# Altium PCB SmartValve.PcbDoc
Units mm, origin at the board's own origin, x right, y up, seen from the top; angles counter-clockwise.
Board outline 65 x 70 mm, 2 copper layers (Top Layer, Bottom Layer); 47 components, 51 nets, 192 pads, 43 vias.
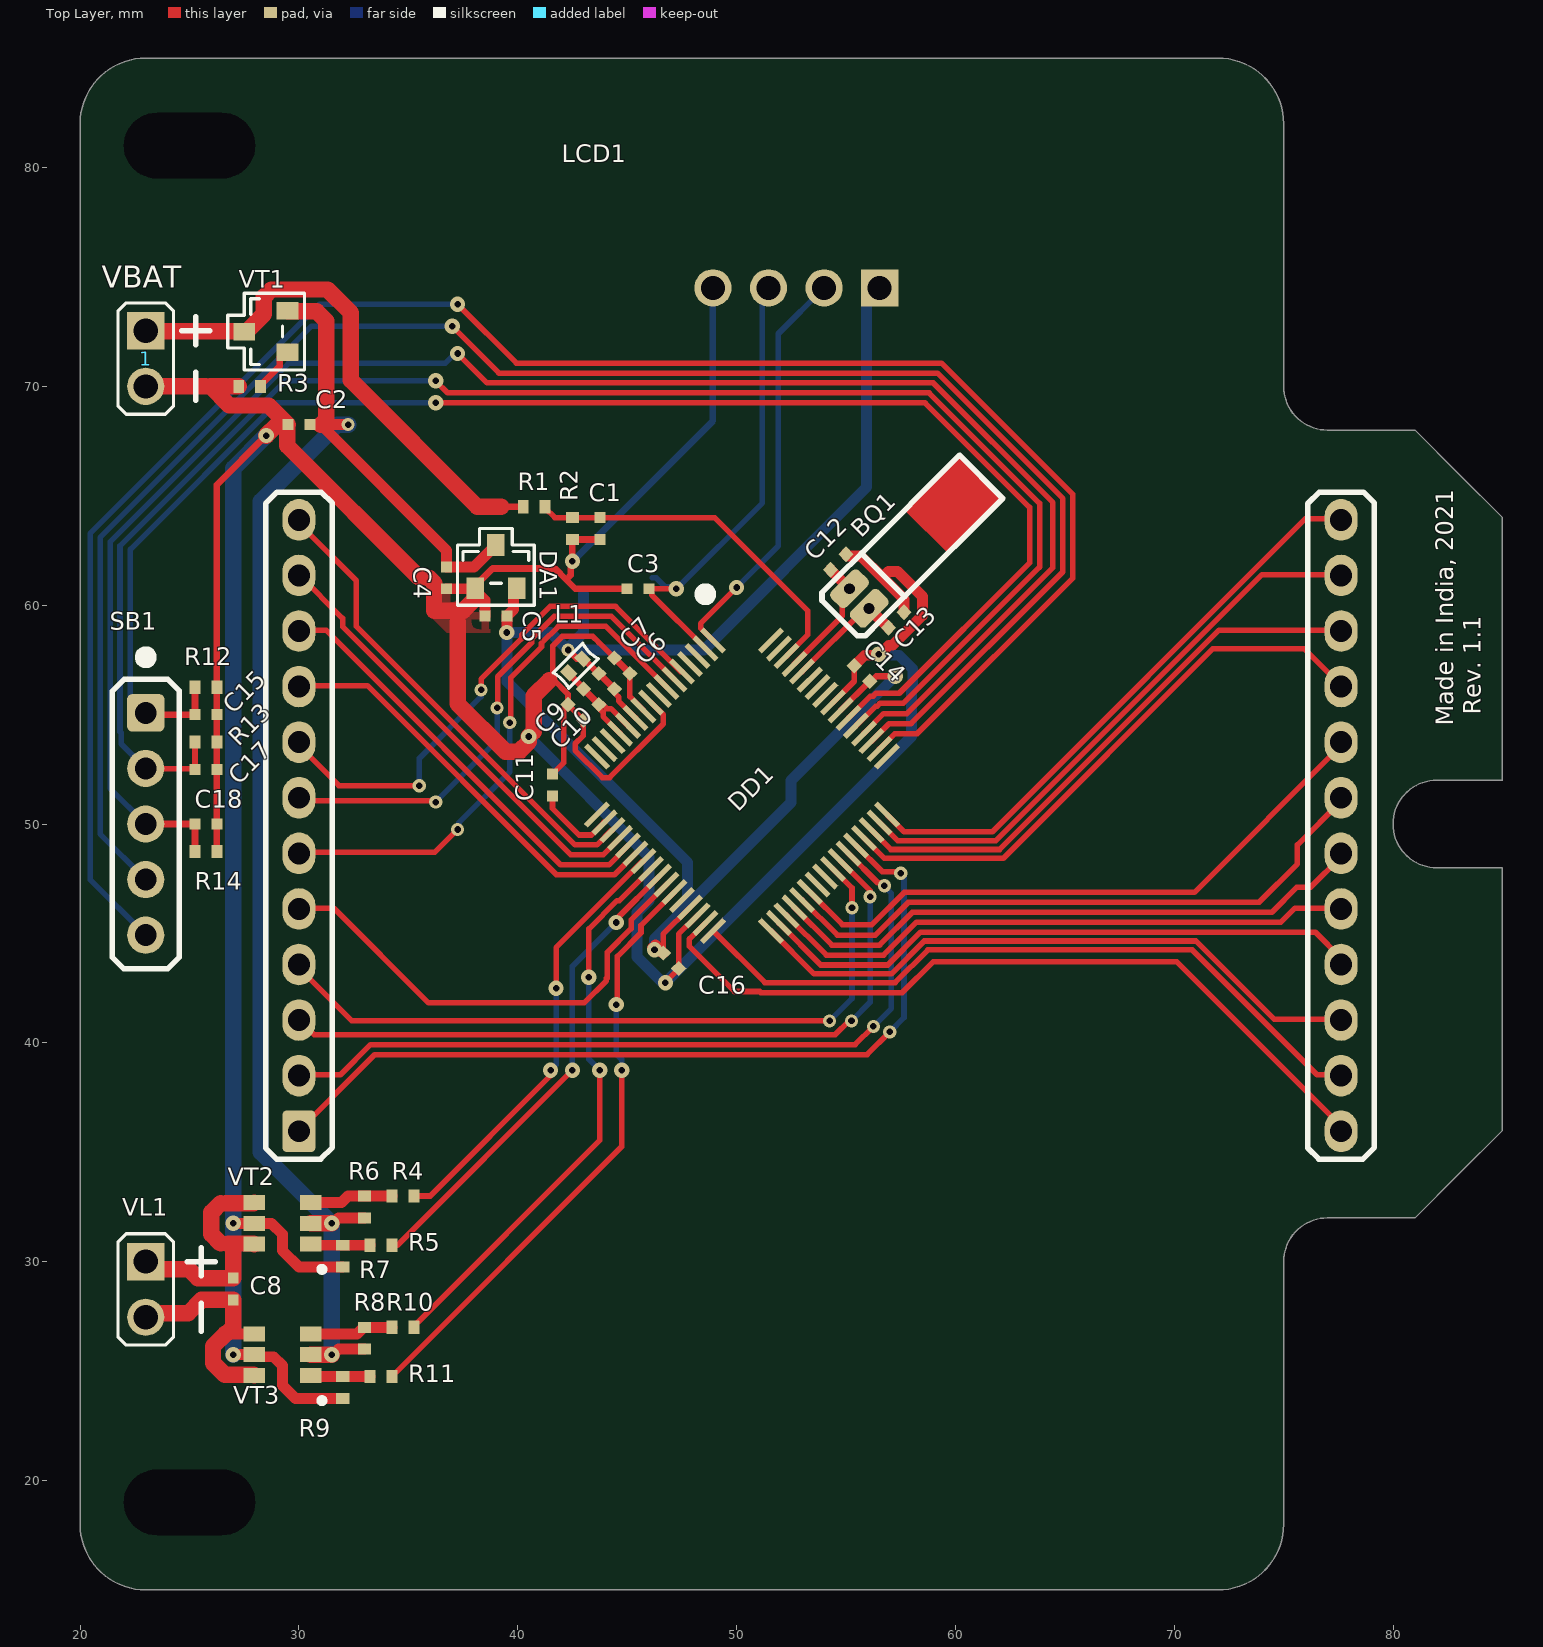
[diagram p0: Top Layer view]
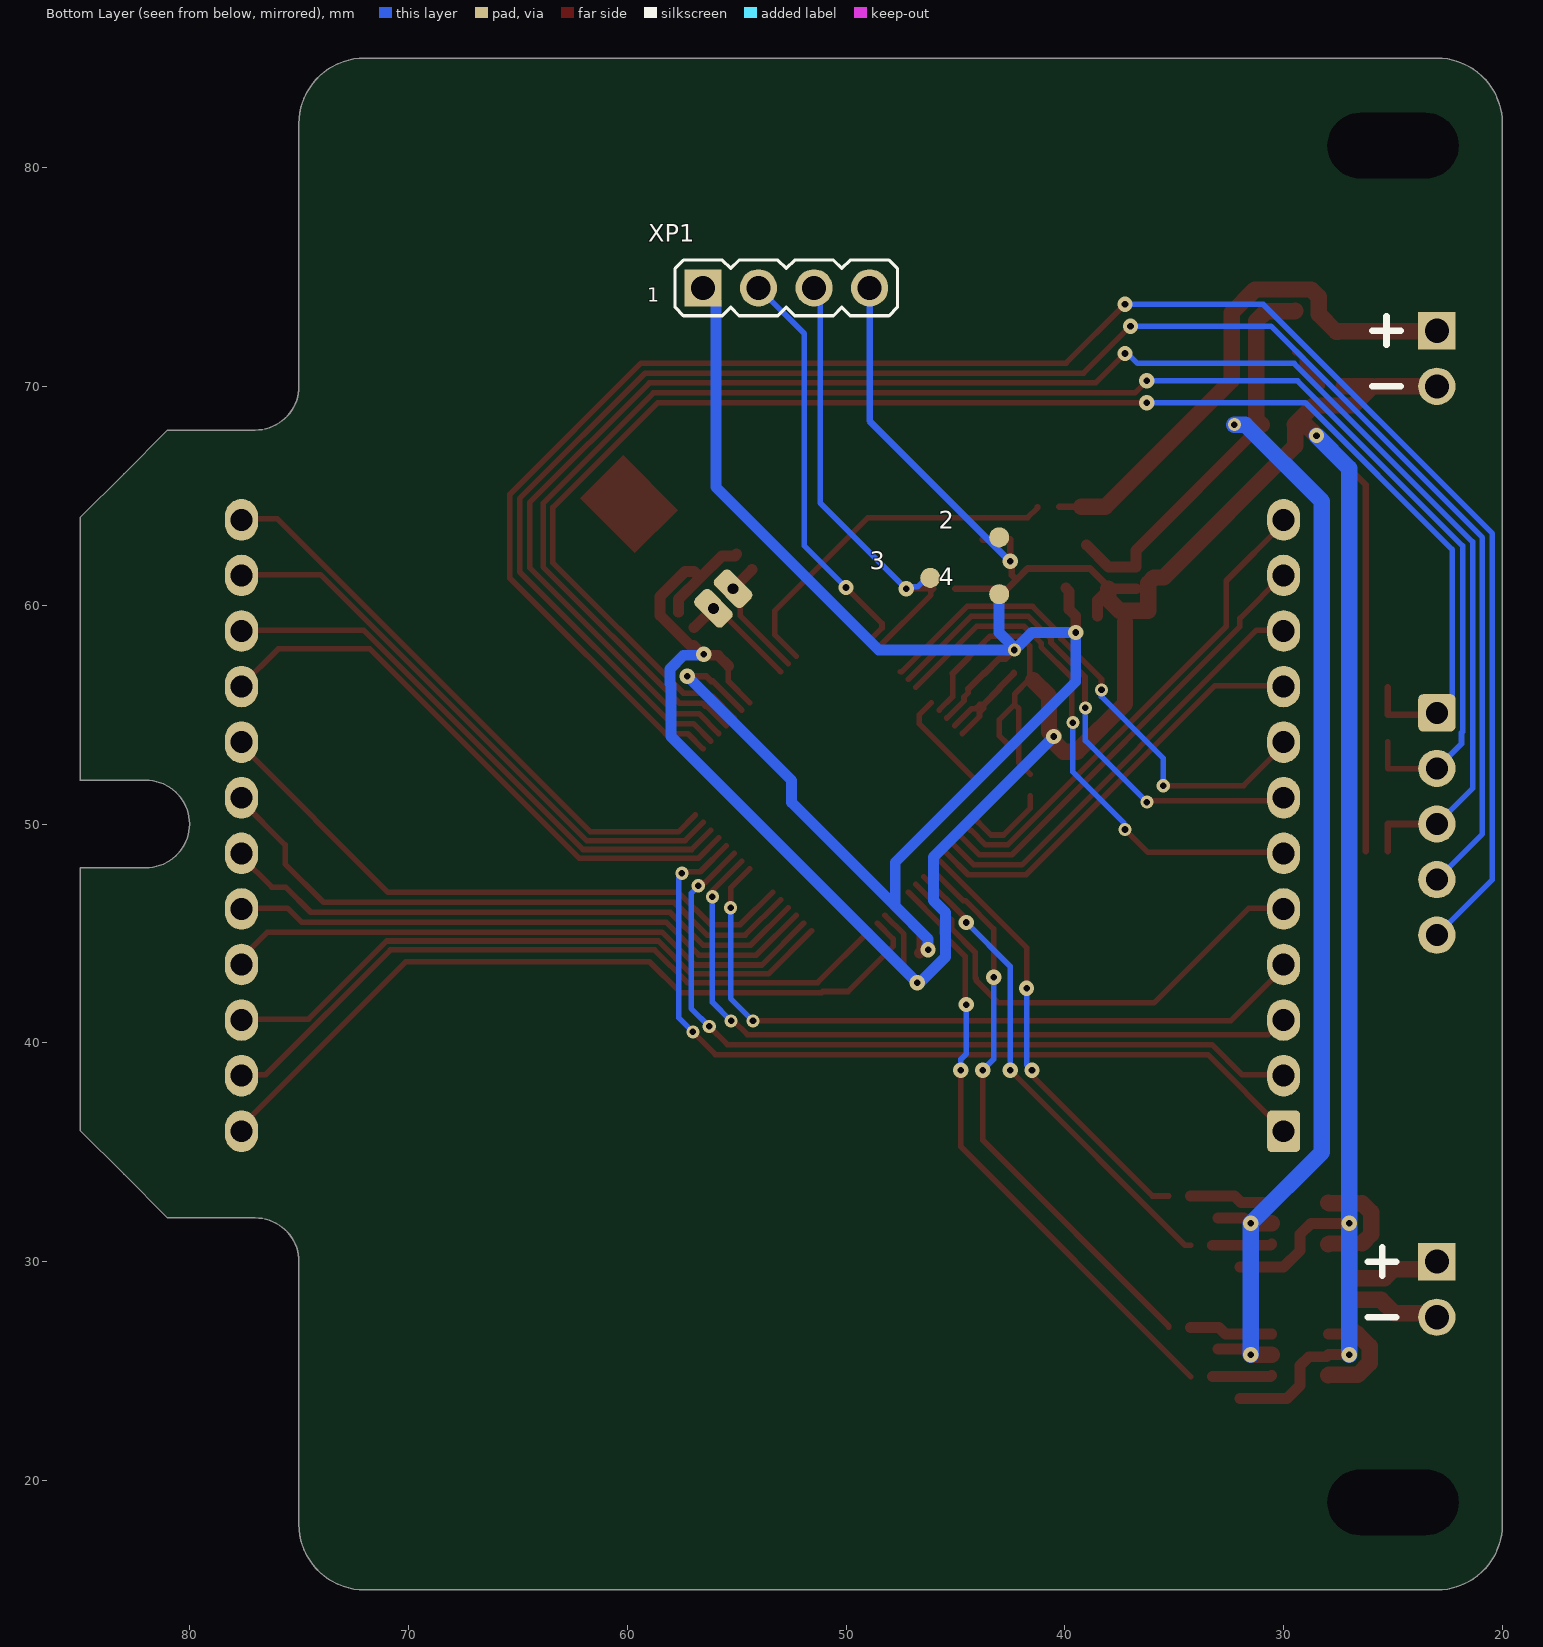
[diagram p1: Bottom Layer view, seen from below]

## Layer stack, top to bottom
Top Solder: solder mask 0.0102, Solder Resist, Dk 3.5
Top Layer: signal copper 0.0356
Dielectric 1: dielectric 0.32, FR-4, Dk 4.8
Bottom Layer: signal copper 0.0356
Bottom Solder: solder mask 0.0102, Solder Resist, Dk 3.5

## Board outline
23,15 72,15 ccw(c72,18) 75,18 75,30 cw(c77,30) 77,32 81,32 83,34 85,36 85,48 82,48 cw(c82,50) 80,50 cw(c82,50) 82,52 85,52 85,64 83,66 81,68 77,68 cw(c77,70) 75,70 75,82 ccw(c72,82) 72,85 23,85 ccw(c23,82) 20,82 20,18 ccw(c23,18)

## Design rules (kind name [scope] priority, off if disabled: settings)
AcuteAngle [All] p1: minimum=3.50000000000000E+0001 checktracksonly=FALSE
BoardOutlineClearance "BoardOutlineClearance 1" [All] p1: gap=0.25 ignorepadtopadclearanceinfootprint=FALSE except(0: Arc-SplitContinuation Track-SplitContinuation SMDPad-SplitContinuation THPad-SplitContinuation Via-SplitContinuation Fill-SplitContinuation Poly-SplitContinuation Region-SplitContinuation Text-SplitContinuation) // Milling
BoardOutlineClearance "BoardOutlineClearance 2" [All] p2: gap=0.4 ignorepadtopadclearanceinfootprint=FALSE except(0: Arc-SplitContinuation Track-SplitContinuation SMDPad-SplitContinuation THPad-SplitContinuation Via-SplitContinuation Fill-SplitContinuation Poly-SplitContinuation Region-SplitContinuation Text-SplitContinuation) // V-Cut
Clearance "Clearance 3 Oz" [All] p1 off: gap=0.35 ignorepadtopadclearanceinfootprint=FALSE except(0.25: Arc-Hole Track-Hole SMDPad-Hole THPad-Hole Via-Hole Fill-Hole Poly-Hole Region-Hole Text-Hole)
Clearance "Clearance 2 Oz" [All] p2 off: gap=0.3 ignorepadtopadclearanceinfootprint=FALSE except(0.25: Arc-Hole Track-Hole SMDPad-Hole THPad-Hole Via-Hole Fill-Hole Poly-Hole Region-Hole Text-Hole)
Clearance "Clearance-1 1 Oz" [All] p3: gap=0.2 ignorepadtopadclearanceinfootprint=FALSE except(0.25: Arc-Hole Track-Hole SMDPad-Hole THPad-Hole Via-Hole Fill-Hole Poly-Hole Region-Hole Text-Hole) // Standart
Clearance "Clearance-2 1 Oz" [All] p4 off: gap=0.15 ignorepadtopadclearanceinfootprint=FALSE except(0.2: Arc-Fill Arc-Poly Track-Fill Track-Poly SMDPad-Fill SMDPad-Poly THPad-Fill THPad-Poly Via-Fill Via-Poly Fill-Fill Fill-Poly Poly-Poly; 0.25: Arc-Hole Track-Hole SMDPad-Hole THPad-Hole Via-Hole Fill-Hole Poly-Hole Region-Hole Text-Hole) // Advance
Clearance "Clearance-1 1/2 Oz" [All] p5 off: gap=0.125 ignorepadtopadclearanceinfootprint=FALSE except(0.2: Arc-Fill Arc-Poly Track-Fill Track-Poly SMDPad-SMDPad SMDPad-Fill SMDPad-Poly THPad-Fill THPad-Poly Via-Fill Via-Poly Fill-Fill Fill-Poly Poly-Poly Poly-Region Poly-Text; 0.25: Arc-Hole Track-Hole SMDPad-Hole THPad-Hole Via-Hole Fill-Hole Poly-Hole Region-Hole Text-Hole) // Standart
Clearance "Clearance-2 1/2 Oz" [All] p6 off: gap=0.1 ignorepadtopadclearanceinfootprint=FALSE except(0.15: Arc-Fill Arc-Poly Track-Fill Track-Poly SMDPad-SMDPad SMDPad-Fill SMDPad-Poly THPad-Fill THPad-Poly Via-Fill Via-Poly Fill-Fill Fill-Poly Poly-Poly Poly-Region Poly-Text; 0.25: Arc-Hole Track-Hole SMDPad-Hole THPad-Hole Via-Hole Fill-Hole Poly-Hole Region-Hole Text-Hole) // Advance
DiffPairsRouting "DiffPairsRouting 1 Oz" [All] p1: maxlimit=0.254 minlimit=0.2 mostfreqgap=0.254 toplayer_minwidth=0.2 toplayer_maxwidth=0.381 toplayer_prefwidth=0.381 bottomlayer_minwidth=0.2 bottomlayer_maxwidth=0.381 bottomlayer_prefwidth=0.381 maxuncoupledlength=12.7
DiffPairsRouting "DiffPairsRouting 1/2 Oz" [All] p2: maxlimit=0.254 minlimit=0.1 mostfreqgap=0.254 toplayer_minwidth=0.1 toplayer_maxwidth=0.381 toplayer_prefwidth=0.381 bottomlayer_minwidth=0.1 bottomlayer_maxwidth=0.381 bottomlayer_prefwidth=0.381 maxuncoupledlength=12.7
HoleSize "Minimum HoleSize" [IsPad] p1: absolutevalues=TRUE maxlimit=5.9 minlimit=0.6 maxpercent=80.000 minpercent=20.000
HoleSize "Minimum HoleSize VIA 1" [IsVia] p2: absolutevalues=TRUE maxlimit=5.9 minlimit=0.3 maxpercent=80.000 minpercent=20.000 // Standart
HoleSize "Minimum HoleSize VIA 2" [IsVia] p3: absolutevalues=TRUE maxlimit=5.9 minlimit=0.2 maxpercent=80.000 minpercent=20.000 // Advance
HoleToHoleClearance Hole2HoleClearance [All] p1: gap=0.25 allowstackedmicrovias=FALSE
MinimumAnnularRing "Minimum AR VIA Standart" [All] p1: minimumring=0.15
MinimumAnnularRing "Minimum AR PAD Standart" [All] p2: minimumring=0.2
MinimumAnnularRing "Minimum AR VIA Advance" [All] p3: minimumring=0.1
MinimumAnnularRing "Minimum AR PAD Advance" [All] p4: minimumring=0.15
MinimumSolderMaskSliver "SolderMask Bridge Standart" [All] p1: minsoldermaskwidth=0.15 // All Masks
MinimumSolderMaskSliver "SolderMask Bridge Advance" [All] p2: minsoldermaskwidth=0.1 // Mask LDI
PlaneClearance "PlaneClearance 3 Oz" [All] p1: clearance=0.35
PlaneClearance "PlaneClearance 2 Oz" [All] p2: clearance=0.3
PlaneClearance "PlaneClearance 1 Oz" [All] p3: clearance=0.2
PlaneClearance "PlaneClearance-1 1/2 Oz" [All] p4: clearance=0.2 // Standart
PlaneClearance "PlaneClearance-2 1/2 Oz" [All] p5: clearance=0.15 // Advance
PlaneConnect "TermalConnect 3 Oz" [All] p1: planeconnectstyle=Relief reliefexpansion=0.2 reliefentries=4 reliefconductorwidth=0.35 reliefairgap=0.35 // Standart
PlaneConnect "TermalConnect 2 Oz" [All] p2: planeconnectstyle=Relief reliefexpansion=0.2 reliefentries=4 reliefconductorwidth=0.3 reliefairgap=0.3 // Standart
PlaneConnect "TermalConnect-1 1 Oz" [All] p3: planeconnectstyle=Relief reliefexpansion=0.2 reliefentries=4 reliefconductorwidth=0.2 reliefairgap=0.2 // Standart
PlaneConnect "TermalConnect-2 1 Oz" [All] p4: pad.planeconnectstyle=Relief pad.reliefexpansion=0.15 pad.reliefentries=4 pad.reliefconductorwidth=0.2 pad.reliefairgap=0.2 via.planeconnectstyle=Direct via.reliefexpansion=0.15 via.reliefentries=4 via.reliefconductorwidth=0.15 via.reliefairgap=0.15 // Advance
PlaneConnect "TermalConnect-1 1/2 Oz" [All] p5: planeconnectstyle=Relief reliefexpansion=0.2 reliefentries=4 reliefconductorwidth=0.2 reliefairgap=0.2 // Standart
PlaneConnect "TermalConnect-2 1/2 Oz" [All] p6: pad.planeconnectstyle=Relief pad.reliefexpansion=0.15 pad.reliefentries=4 pad.reliefconductorwidth=0.15 pad.reliefairgap=0.15 via.planeconnectstyle=Direct via.reliefexpansion=0.15 via.reliefentries=4 via.reliefconductorwidth=0.15 via.reliefairgap=0.15 // Advance
PolygonConnect "PolygonConnect 3 Oz" [All] p1: thpad.connectstyle=Relief thpad.reliefconductorwidth=0.35 thpad.reliefentries=4 thpad.polygonreliefangle="90 Angle" thpad.airgapwidth=0.35 smdpad.connectstyle=Relief smdpad.reliefconductorwidth=0.35 smdpad.reliefentries=4 smdpad.polygonreliefangle="90 Angle" smdpad.airgapwidth=0.35 via.connectstyle=Direct via.reliefconductorwidth=0.254 via.reliefentries=4 via.polygonreliefangle="90 Angle" via.airgapwidth=0.254
PolygonConnect "PolygonConnect 2 Oz" [All] p2: thpad.connectstyle=Relief thpad.reliefconductorwidth=0.3 thpad.reliefentries=4 thpad.polygonreliefangle="90 Angle" thpad.airgapwidth=0.3 smdpad.connectstyle=Relief smdpad.reliefconductorwidth=0.3 smdpad.reliefentries=4 smdpad.polygonreliefangle="90 Angle" smdpad.airgapwidth=0.3 via.connectstyle=Direct via.reliefconductorwidth=0.254 via.reliefentries=4 via.polygonreliefangle="90 Angle" via.airgapwidth=0.254
PolygonConnect "PolygonConnect-1 1 Oz" [All] p3: thpad.connectstyle=Relief thpad.reliefconductorwidth=0.2 thpad.reliefentries=4 thpad.polygonreliefangle="90 Angle" thpad.airgapwidth=0.2 smdpad.connectstyle=Relief smdpad.reliefconductorwidth=0.2 smdpad.reliefentries=4 smdpad.polygonreliefangle="90 Angle" smdpad.airgapwidth=0.2 via.connectstyle=Direct via.reliefconductorwidth=0.254 via.reliefentries=4 via.polygonreliefangle="90 Angle" via.airgapwidth=0.254 // Standart
PolygonConnect "PolygonConnect-2 1 Oz" [All] p4: thpad.connectstyle=Relief thpad.reliefconductorwidth=0.15 thpad.reliefentries=4 thpad.polygonreliefangle="90 Angle" thpad.airgapwidth=0.15 smdpad.connectstyle=Relief smdpad.reliefconductorwidth=0.15 smdpad.reliefentries=4 smdpad.polygonreliefangle="90 Angle" smdpad.airgapwidth=0.15 via.connectstyle=Direct via.reliefconductorwidth=0.254 via.reliefentries=4 via.polygonreliefangle="90 Angle" via.airgapwidth=0.254 // Advance
PolygonConnect "PolygonConnect-1 1/2 Oz" [All] p5: thpad.connectstyle=Relief thpad.reliefconductorwidth=0.15 thpad.reliefentries=4 thpad.polygonreliefangle="90 Angle" thpad.airgapwidth=0.2 smdpad.connectstyle=Relief smdpad.reliefconductorwidth=0.2 smdpad.reliefentries=4 smdpad.polygonreliefangle="90 Angle" smdpad.airgapwidth=0.2 via.connectstyle=Direct via.reliefconductorwidth=0.254 via.reliefentries=4 via.polygonreliefangle="90 Angle" via.airgapwidth=0.254 // Standart
PolygonConnect "PolygonConnect-2 1/2 Oz" [All] p6: thpad.connectstyle=Relief thpad.reliefconductorwidth=0.125 thpad.reliefentries=4 thpad.polygonreliefangle="90 Angle" thpad.airgapwidth=0.15 smdpad.connectstyle=Relief smdpad.reliefconductorwidth=0.125 smdpad.reliefentries=4 smdpad.polygonreliefangle="90 Angle" smdpad.airgapwidth=0.15 via.connectstyle=Direct via.reliefconductorwidth=0.254 via.reliefentries=4 via.polygonreliefangle="90 Angle" via.airgapwidth=0.254 // Advance
RoutingCorners [All] p1 off: cornerstyle=45-Degree minsetback=2.54 maxsetback=2.54
RoutingVias [All] p1: holewidth=0.3 width=0.6 viastyle="Through Hole" minholewidth=0.2 minwidth=0.4 maxholewidth=5.9 maxwidth=6.4
SilkToSilkClearance Silk2SilkClearance [All] p1 off: silktosilkclearance=0.15
SilkToSolderMaskClearance Silk2SolderMaskClearance [IsPad] p1 off: minsilkscreentomaskgap=0.15 clearancetoexposedcopper=TRUE
SolderMaskExpansion SolderMaskExpansion-1 [All] p1: expansion=0.05 // Standart
SolderMaskExpansion "SolderMaskExpansion LDI" [All] p2: expansion=0.025 // Advance
UnRoutedNet [All] p1: checkbadconnections=TRUE
Width "Width 3 Oz" [All] p1 off: maxlimit=10 minlimit=0.35 preferedwidth=0.4 checkconnectedcopper=TRUE
Width "Width 2 Oz" [All] p2 off: maxlimit=10 minlimit=0.3 preferedwidth=0.35 minimp=50.000000 maximp=50.000000 favimp=50.000000 checkconnectedcopper=TRUE
Width "Width 1 Oz" [All] p3: maxlimit=10 minlimit=0.15 preferedwidth=0.2 checkconnectedcopper=TRUE
Width "Width 1/2 Oz" [All] p4 off: maxlimit=10 minlimit=0.1 preferedwidth=0.125 checkconnectedcopper=TRUE
20 further rules are at their usual default settings.

## Classes and differential pairs
component class SmartValve: 1 2 3 4 BQ1 C1 C2 C3 C4 C5 C6 C7 C8 C9 C10 C11 C12 C13 C14 C15 C16 C17 C18 DA1 DD1 L1 R1 R2 R3 R4 R5 R6 R7 R8 R9 R10 R11 SB1 VL1 VT1 VT2 VT3 XP1

## Components (designator, comment, footprint, x,y, rotation, side; value= is the part's Value field where it differs from the comment)
1 "3xAA" BAT_3AA 23,72.54 r270 top
2 "=Note" TP_36_PAD 43,63.1 r90 bottom
3 "=Note" TP_36_PAD 46.15,61.246 r90 bottom
4 "=Note" TP_36_PAD 43,60.5 r90 bottom
BQ1 "AB26T" "6.2 x 02.1MM CYLINDER PACKAGE" 55.16,60.751 r315 top
C1 "0.01uF" CC0402_0.5mm 43.75,63.5 r270 top
C2 "1uF" CC0402_0.5mm 30,68.25 r180 top
C3 "0.1uF" CC0402_0.5mm 45.5,60.75 r180 top
C4 "1uF" CC0402_0.5mm 36.75,61.25 r270 top
C5 "1uF" CC0402_0.5mm 39,59.5 r180 top
C6 "0.1uF" CC0402_0.5mm 44.77,56.523 r45 top
C7 "1uF" CC0402_0.5mm 44.063,57.23 r45 top
C8 "1uF" CC0402_0.5mm 27,28.75 r270 top
C9 "1uF" CC0402_0.5mm 42.649,55.816 r225 top
C10 "0.1uF" CC0402_0.5mm 43.356,55.109 r225 top
C11 "1uF" CC0402_0.5mm 41.588,51.78 r90 top
C12 "10.0" CC0402_0.5mm 54.644,61.975 r225 top
C13 "10.0" CC0402_0.5mm 57.296,59.323 r225 top
C14 "1uF" CC0402_0.5mm 55.73,56.877 r315 top
C15 "0.1uF" CC0402_0.5mm 25.75,55 r180 top
C16 "1uF" CC0402_0.5mm 47,43.75 r135 top
C17 "0.1uF" CC0402_0.5mm 25.75,52.5 r180 top
C18 "0.1uF" CC0402_0.5mm 25.75,50 r180 top
DA1 "AP2138" SOT-23 39,61.75 r90 top
DD1 "STM8L052R8" TQFP-64 50.25,51.75 r315 top
L1 "BLM15AG-600 Ом" CL0402(1005) 42.649,57.23 r225 top value="600 Ом"
LCD1 "8x16" LCD_8x16 30,35.96 r0 top
R1 "2M" RC0402 40.75,64.5 r0 top
R2 "2M" RC0402 42.5,63.5 r270 top
R3 "10k" RC0402 27.75,70 r180 top
R4 "150.0" RC0402 34.75,33 r180 top
R5 "150.0" RC0402 33.75,30.75 r180 top
R6 "10k" RC0402 33,32.5 r270 top
R7 "10k" RC0402 32,30.25 r270 top
R8 "10k" RC0402 33,26.5 r90 top
R9 "10k" RC0402 32,24.25 r90 top
R10 "150.0" RC0402 34.75,27 r0 top
R11 "150.0" RC0402 33.75,24.75 r0 top
R12 "10k" RC0402 25.75,56.25 r0 top
R13 "10k" RC0402 25.75,53.75 r0 top
R14 "10k" RC0402 25.75,48.75 r0 top
SB1 "SB?" "Membrane keyboard" 23,55.08 r270 top
VL1 "Electric valve" "Electric valve" 23,30 r270 top
VT1 "IRLML6402" SOT-23 28.5,72.5 r180 top
VT2 "FDC6420C" SuperSOT-6 29.25,31.75 r0 top
VT3 "FDC6420C" SuperSOT-6 29.25,25.75 r0 top
XP1 "PLS-4" PLS-4 56.54,74.5 r180 bottom

## Footprints (in the part's own frame and the unit in brackets; to place one, negate y for a bottom-side part, rotate by r counter-clockwise, add the part's x,y. Pads: shape width x height; smd on the part's side, far side on the other; paste and mask are expansions set on the pad)
"6.2 x 02.1MM CYLINDER PACKAGE" [mm]
  rrect50% 1x1.8 hole 0.5: 1(0,0) 2(1.27,0)
  Top Layer region: -0.762,4.318 2.032,4.318 2.032,7.874 -0.762,7.874
  silkscreen extent -0.76,-1.27 2.03,7.87, body extent -0.45,-0.2 1.65,7.65, height 2.15
BAT_3AA [mm]
  rect 1.7x1.7 hole 1.1: 1(0,0)
  round 1.7 hole 1.1: 2(2.54,0)
  silkscreen extent -1.27,-1.27 3.81,2.92
CC0402_0.5mm [mm] "RIHP"
  rrect2% 0.5x0.5 smd paste-1 mask+0.075: 1(-0.5,0) 2(0.5,0)
  Top Layer pour cut-out: -0.275,0.4 -0.275,-0.4 0.275,-0.4 0.275,0.4
  body extent -0.5,-0.25 0.5,0.25, height 0.48
CL0402(1005) [mm] "Chip Capacitor, Body 1.0x0.5mm, Height 0.33mm, IPC Medium Density"
  rect 0.5x0.62 smd: 1(-0.45,0) 2(0.45,0)
  silkscreen extent -0.95,-0.5 0.95,0.5, body extent -0.5,-0.3 0.5,0.3, height 0.2
"Electric valve" [mm]
  rect 1.7x1.7 hole 1.1: 1(0,0)
  round 1.7 hole 1.1: 2(2.54,0)
  silkscreen extent -1.27,-1.27 3.81,3.17
LCD_8x16 [mm]
  rrect25% 1.5x1.9 hole 1: 1(0,0)
  oval 1.5x1.9 hole 1: 2(0,2.54) 3(0,5.08) 4(0,7.62) 5(0,10.16) 6(0,12.7) 7(0,15.24) 8(0,17.78) 9(0,20.32) 10(0,22.86) 11(0,25.4) 12(0,27.94) 13(47.625,27.94) 14(47.625,25.4) 15(47.625,22.86) 16(47.625,20.32) 17(47.625,17.78) 18(47.625,15.24) 19(47.625,12.7) 20(47.625,10.16) 21(47.625,7.62) 22(47.625,5.08) 23(47.625,2.54) 24(47.625,0)
  silkscreen extent -1.52,-1.27 49.15,29.21, body extent -0.2,-16.1 47.8,43.9, height 14.8
"Membrane keyboard" [mm]
  rrect25% 1.7x1.7 hole 1: 1(0,0)
  round 1.7 hole 1: 2(2.54,0) 3(5.08,0) 4(7.62,0) 5(10.16,0)
  silkscreen extent -2.79,-1.52 11.68,1.52, body extent -1.27,-1.27 11.43,1.27, height 8.44
PLS-4 [mm]
  rect 1.7x1.7 hole 1.1: 1(0,0)
  round 1.7 hole 1.1: 2(2.54,0) 3(5.08,0) 4(7.62,0)
  silkscreen extent -1.27,-1.27 8.89,1.27, body extent -1.27,-1.27 8.89,1.27, height 8.8
RC0402 [mm] "Yageo"
  rrect2% 0.5x0.6 smd paste-1 mask+0.1: 1(-0.5,0) 2(0.5,0)
  Top Layer pour cut-out: -0.4,0.5 0.4,0.5 0.4,-0.5 -0.4,-0.5
  body extent -0.5,-0.25 0.5,0.25, height 0.27
SOT-23 [mm]
  rect 1x0.8 smd: 1(-0.975,0.95) 2(-0.975,-0.95) 3(1,0)
  silkscreen extent -1.75,-1.75 1.75,1.75, body extent -1.3,-1.5 1.3,1.5, height 1.12
SuperSOT-6 [mm] "SOT23, 6-Leads, Body 2.92x2.84mm, Pitch 0.95mm, IPC Medium Density"
  rrect2% 0.99x0.69 smd mask+0.05: 1(1.295,-0.95) 2(1.295,0) 3(1.295,0.95) 4(-1.295,0.95) 5(-1.295,0) 6(-1.295,-0.95)
  silkscreen extent 1.68,-2.22 1.92,-1.98, body extent -1.5,-1.5 1.5,1.5, height 1.3
TP_36_PAD [mil]
  round 36 smd paste-1000 mask+3.94: 1(0,0)
  body extent -37,-37 37,37, height 4
TQFP-64 [mm]
  rrect2% 1.45x0.25 smd paste-0.025 mask+0.05: 1(-5.625,3.75) 2(-5.625,3.25) 3(-5.625,2.75) 4(-5.625,2.25) 5(-5.625,1.75) 6(-5.625,1.25) 7(-5.625,0.75) 8(-5.625,0.25) 9(-5.625,-0.25) 10(-5.625,-0.75) 11(-5.625,-1.25) 12(-5.625,-1.75) 13(-5.625,-2.25) 14(-5.625,-2.75) 15(-5.625,-3.25) 16(-5.625,-3.75) 33(5.625,-3.75) 34(5.625,-3.25) 35(5.625,-2.75) 36(5.625,-2.25) 37(5.625,-1.75) 38(5.625,-1.25) 39(5.625,-0.75) 40(5.625,-0.25) 41(5.625,0.25) 42(5.625,0.75) 43(5.625,1.25) 44(5.625,1.75) 45(5.625,2.25) 46(5.625,2.75) 47(5.625,3.25) 48(5.625,3.75)
  rrect2% 0.25x1.45 smd paste-0.025 mask+0.05: 17(-3.75,-5.625) 18(-3.25,-5.625) 19(-2.75,-5.625) 20(-2.25,-5.625) 21(-1.75,-5.625) 22(-1.25,-5.625) 23(-0.75,-5.625) 24(-0.25,-5.625) 25(0.25,-5.625) 26(0.75,-5.625) 27(1.25,-5.625) 28(1.75,-5.625) 29(2.25,-5.625) 30(2.75,-5.625) 31(3.25,-5.625) 32(3.75,-5.625) 49(3.75,5.625) 50(3.25,5.625) 51(2.75,5.625) 52(2.25,5.625) 53(1.75,5.625) 54(1.25,5.625) 55(0.75,5.625) 56(0.25,5.625) 57(-0.25,5.625) 58(-0.75,5.625) 59(-1.25,5.625) 60(-1.75,5.625) 61(-2.25,5.625) 62(-2.75,5.625) 63(-3.25,5.625) 64(-3.75,5.625)
  silkscreen extent -7.62,4.75 -7.13,5.25, body extent -6.1,-6.1 6.1,6.1, height 1.2

## Part data
2 3 4: library part TP_36_PAD, "Тестпоинт монтажа", ComponentHeight=0.0, ComponentVersion=0, Creator="Турнаев С.С.", Name=TP_36_PAD, Part Number=TP_36_PAD, PatternVersion=0, Type=Testpoint
BQ1: Supplier Part Number 1=1861653, Supplier 1=Farnell
C1: library part C0402_X7R_0.1uF_10%_16V, "Конденсатор SMD CC 0402-X7R-0,1uF-10%-16V CC0402KRX7R7BB104 YAGEO (CL05B104KO5NNNC SAMSUNG, GRM155R71C104KA57D MURATA)", Manufacturer=Yageo, Part Number=C0402_X7R_0.01uF_10%_50V, TempRange=-55..+125°C, Tolerance=10%, Voltage=50V, ComponentHeight=0.5mm, ComponentLink1Description=Manufacturer, ComponentLink1URL=http://www.yageo.com/, ComponentLink2Description=Datasheet, ComponentLink2URL=\\192.168.11.60\BolidLibrary\Altium\Database\Datasheets\727234197.pdf, ComponentLink3Description="Datasheet 2", ComponentLink4Description="Datasheet 3", ComponentVersion=0, Creator="Турнаев С.С.", Developer_ID=333447376, DeveloperMnemocod=C0402_X7R_0.01uF_10%_50V, DeveloperRecomend=Желательно, Name=C0402_X7R_0.01uF_10%_50V, PatternVersion=1, Type=X7R
C2 C4 C5 C7 C8 C9 C11 C14 C16: library part C0402_X5R_1uF_10%_10V, "Конденсатор SMD CC 0402-X5R-1uF-10%-10V CL05A105KP5NNNC SAMSUNG", Manufacturer=Yageo, TempRange=-55..+85°C, Tolerance=10%, Voltage=10V, ComponentHeight=0.5mm, ComponentLink1Description=Manufacturer, ComponentLink1URL=http://www.yageo.com/, ComponentLink2Description=Datasheet, ComponentLink3Description="Datasheet 2", ComponentLink4Description="Datasheet 3", ComponentVersion=0, Creator="Турнаев С.С.", Developer_ID=539117446, DeveloperMnemocod=C0402_X5R_1uF_10%_10V, Name=C0402_X5R_1uF_10%_10V, Part Number=C0402_X5R_1uF_10%_10V, PatternVersion=1, Type=X5R
C3 C6 C10 C15 C17 C18: library part C0402_X7R_0.1uF_10%_16V, "Конденсатор SMD CC 0402-X7R-0,1uF-10%-16V CC0402KRX7R7BB104 YAGEO (CL05B104KO5NNNC SAMSUNG, GRM155R71C104KA57D MURATA)", Manufacturer=Yageo, TempRange=-55..+125°C, Tolerance=10%, Voltage=16V, ComponentHeight=0.5mm, ComponentLink1Description=Manufacturer, ComponentLink1URL=http://www.yageo.com/, ComponentLink2Description=Datasheet, ComponentLink2URL=\\192.168.11.60\BolidLibrary\Altium\Database\Datasheets\727234197.pdf, ComponentLink3Description="Datasheet 2", ComponentLink4Description="Datasheet 3", ComponentVersion=0, Creator="Турнаев С.С.", Developer_ID=333447376, DeveloperMnemocod=C0402_X7R_0.1uF_10%_16V, DeveloperRecomend=Желательно, Name=C0402_X7R_0.1uF_10%_16V, Part Number=C0402_X7R_0.1uF_10%_16V, PatternVersion=1, Type=X7R
C12 C13: library part C0402_NP0_10pF_5%_16V, "CC0402 General purpose MLCC", Manufacturer=Yageo, TempRange=-55..+125°C, Tolerance=±5%, Voltage=16V, ComponentHeight=0.5mm, ComponentLink1Description=Manufacturer, ComponentLink1URL=http://www.yageo.com/, ComponentLink2Description=Datasheet, ComponentLink3Description="Datasheet 2", ComponentLink4Description="Datasheet 3", ComponentVersion=0, Creator="Турнаев С.С.", Name=C0402_NP0_10pF_5%_16V, Part Number=C0402_NP0_10pF_5%_16V, PatternVersion=1, Type=NP0
DA1: "Low quiescent current", Supplier Part Number 1=3257434, Supplier 1=Farnell
DD1: "8-bit микроконтроллер Low power"
L1: library part BLM15, "Чип индуктивность подавления EMP", Supplier Part Number 1=1515762, Supplier 1=Farnell, Компэл=BLM15AG601SN1D
LCD1: library part LCD_8x16
R1 R2: library part 0402-2M-1%, "Series RC0402", Manufacturer=Yageo, MaxWorkingVoltage=50V, PowerDiss="0.0625 W", TemperatureCoef="±100 ppm/°C", TempRange=-55..+155°C, Tolerance=±1%, ComponentHeight=0.35mm, ComponentLink1Description=Manufacturer, ComponentLink1URL=http://www.yageo.com/, ComponentLink2Description=Datasheet, ComponentLink3Description="Datasheet 2", ComponentLink4Description="Datasheet 3", ComponentVersion=0, Creator="Турнаев С.С.", Name=0402-2M-1%, Part Number=0402-2M-1%, PatternVersion=1, Type="General purpose"
R3 R6 R7 R8 R9 R12 R13 R14: library part 0402-10K-5%, "Резистор SMD CR 0402-10K-5%-0.063W", Manufacturer=Yageo, MaxWorkingVoltage=50V, PowerDiss="0.0625 W", TemperatureCoef="±100 ppm/°C", TempRange=-55..+155°C, Tolerance=±5%, AnalogDB=0402-10K-1%, ComponentHeight=0.35mm, ComponentLink1Description=Manufacturer, ComponentLink1URL=http://www.yageo.com/, ComponentLink2Description=Datasheet, ComponentLink2URL=\\192.168.11.60\BolidLibrary\Altium\Database\Datasheets\845136600.pdf, ComponentLink3Description="Datasheet 2", ComponentLink4Description="Datasheet 3", ComponentVersion=0, Creator="Турнаев С.С.", Developer_ID=155833251, DeveloperMnemocod=0402-10K-5%, DeveloperRecomend=Желательно, Name=0402-10K-5%, Part Number=0402-10K-5%, PatternVersion=1
R4 R5 R10 R11: library part 0402-150R-5%, "Резистор SMD CR 0402-150R-5%-0.063W", Manufacturer=Yageo, MaxWorkingVoltage=50V, PowerDiss="0.0625 W", TemperatureCoef="±100 ppm/°C", TempRange=-55..+155°C, Tolerance=±5%, AnalogDB=0402-150R-1%, ComponentHeight=0.35mm, ComponentLink1Description=Manufacturer, ComponentLink1URL=http://www.yageo.com/, ComponentLink2Description=Datasheet, ComponentLink2URL=\\192.168.11.60\BolidLibrary\Altium\Database\Datasheets\845136600.pdf, ComponentLink3Description="Datasheet 2", ComponentLink4Description="Datasheet 3", ComponentVersion=0, Creator="Турнаев С.С.", Developer_ID=489132610, DeveloperMnemocod=0402-150R-5%, DeveloperRecomend=Желательно, Name=0402-150R-5%, Part Number=0402-150R-5%, PatternVersion=1
SB1: library part "Membrane keyboard"
VT1: "p - канал", Supplier Part Number 1=IRLML6402GTRPBFDKR-ND, Supplier 1=Digi-Key
VT2 VT3: "Транзистор FDC6420C", Manufacturer=Fairchild, ComponentLink1Description=Manufacturer, ComponentLink1URL=http://www.fairchildsemi.com, ComponentLink2Description=Datasheet, ComponentLink3Description="Datasheet 2", ComponentLink4Description="Datasheet 3", ComponentVersion=0, Creator="Турнаев С.С.", Developer_ID=548145014, DeveloperMnemocod=FDC6420C, Name=FDC6420C, Part Number=FDC6420C, PatternVersion=0
XP1: "Штыри на плату однорядные"

## Free pads (board coordinates)
  round 0 hole 3 slot 6 at 0 deg unplated: 2(25,19) 2(25,81)

## Via types
v1: diameter 0.7, hole 0.3, Top Layer to Bottom Layer, 27 vias
v2: diameter 0.6, hole 0.3, Top Layer to Bottom Layer, 16 vias

## Nets (pads, with @x,y where several pads share a name; then routed paths per layer and width w, separated by ;. In a path a pad name is that pad's centre, name@x,y a point inside that pad or via, vN(x,y) a via of type N, cw(c..) or ccw(c..) an arc to the next point about the centre after c; other vN are vias at no path point)
3.3V: 4.1 C5.1 C6.1 C7.1 C14.2 C16.2 DA1.2 DD1.11 DD1.29 DD1.55 L1.1 XP1.1 | length 78.3
  Top Layer w0.254: C6.1 44.416,55.995 44.608,55.804 44.608,55.627 45.389,54.846 DD1.11 ; C16.2 46.646,44.964 DD1.29 ; DD1.55 C14.2
  Top Layer w0.3: v2(42.302,57.953) 42.707,57.548 L1.1 ; L1.1@43.002,57.548 43.674,56.877 C7.1 C6.1 ; C14.2 56.155,56.523 56.382,56.75 v1(57.25,56.75)
  Top Layer w0.5: v1(39.5,58.75) C5.1 39.8,59.8 39.8,60.625 DA1.2 ; v1(46.25,44.25) 46.163,44.337 46.288,44.462 C16.2
  Bottom Layer w0.5: 4.1 43,58.75 42.302,58.052 v2(42.302,57.953) ; v1(46.25,44.25) 46.25,44.75 47.75,46.25 ; XP1.1 55.94,73.9 55.94,65.39 48.503,57.953 v2(42.302,57.953) ; v1(57.25,56.75) 52.481,51.981 52.481,50.981 47.75,46.25 ; v2(42.302,57.953) 42.297,57.953 41.5,58.75 v1(39.5,58.75) 39.5,56.5 47.75,48.25 47.75,46.25
4.5V: C2.1 C4.1 DA1.3 R6.2 R8.1 VT1.2 VT2.2 VT3.2 | length 70.1
  Top Layer w0.5: v1(31.5,25.75) 31.554,25.75 31.804,26 R8.1 ; 31.804,32 R6.2 ; v2(32.25,68.25) 31,68.25 36.75,62.5 C4.1 38,61.75 DA1.3
  Top Layer w0.75: VT1.2 29.5,73.425 30.811,73.425 31.25,72.986 31.25,68.5 31,68.25 ; VT3.2 v1(31.5,25.75) ; VT2.2 v1(31.5,31.75)
  Bottom Layer w0.75: v1(31.5,25.75) v1(31.5,31.75) 28.25,35 28.25,64.75 31.75,68.25 v2(32.25,68.25)
+_-: C18.2 DD1.52 R14.1 SB1.3 | length 81.3
  Top Layer w0.254: v1(37.25,71.5) 38.596,70.154 58.987,70.154 64.457,64.684 64.457,61.715 57.782,55.04 56.722,55.04 DD1.52
  Top Layer w0.3: SB1.3 C18.2 R14.1
  Bottom Layer w0.254: SB1.3 21.369,51.631 21.369,62.896 29.522,71.049 36.678,71.049 37.129,71.5 v1(37.25,71.5)
COM1: DD1.5 LCD1.8 | length 24.4
  Top Layer w0.254: LCD1.8@30,53.78 30,53.58 31.83,51.75 v2(35.5,51.75) ; v2(38.325,56.125) 38.325,56.618 40.177,58.47 40.177,58.641 41.478,59.942 44.468,59.942 47.445,56.965 DD1.5
  Bottom Layer w0.254: v2(35.5,51.75) 35.5,53 38.325,55.825 v2(38.325,56.125)
COM1But: DD1.51 SB1.4 | length 83
  Top Layer w0.254: v1(37,72.75) 39.142,70.608 59.175,70.608 64.911,64.872 64.911,61.527 57.97,54.586 56.976,54.586 DD1.51
  Bottom Layer w0.254: SB1.4 20.915,49.545 20.915,63.084 30.581,72.75 v1(37,72.75)
COM2: DD1.6 LCD1.7 | length 23.8
  Top Layer w0.254: LCD1.7@30,51.24 30.174,51.066 36.184,51.066 v2(36.25,51) ; v2(39.058,55.308) 39.077,55.327 39.077,56.728 40.631,58.282 40.631,58.453 41.666,59.488 44.28,59.488 DD1.6
  Bottom Layer w0.254: v2(36.25,51) 39.058,53.808 v2(39.058,55.308)
COM2But: DD1.50 SB1.5 | length 88.1
  Top Layer w0.254: v1(37.25,73.75) 39.938,71.062 59.363,71.062 65.365,65.06 65.365,61.24 58.257,54.132 57.232,54.132 56.528,53.429 DD1.50
  Bottom Layer w0.254: SB1.5 20.461,47.459 20.461,63.272 30.939,73.75 v1(37.25,73.75)
COM3: DD1.7 LCD1.6 | length 25
  Top Layer w0.254: LCD1.6@30,48.7 36.2,48.7 v2(37.25,49.75) ; v2(39.635,54.635) 39.685,54.685 39.685,56.693 41.085,58.093 41.085,58.265 41.854,59.034 44.027,59.034 DD1.7
  Bottom Layer w0.254: v2(37.25,49.75) 37.316,49.816 37.316,50.066 39.635,52.385 v2(39.635,54.635)
COM4: DD1.26 LCD1.5 | length 21.8
  Top Layer w0.254: LCD1.5@30,46.16 31.59,46.16 35.927,41.823 43.03,41.823 44.046,42.839 44.046,42.959 ; 44.096,42.959 44.096,44.139 45.177,45.219 45.177,45.616 DD1.26
COM5: DD1.41 LCD1.4 | length 33.2
  Top Layer w0.254: LCD1.4@30,43.62 30,43.42 32.42,41 v2(54.25,41) ; DD1.41 55.275,47.079 v2(55.275,46.175)
  Bottom Layer w0.254: v2(54.25,41) 55.275,42.025 v2(55.275,46.175)
COM6: DD1.42 LCD1.3 | length 34
  Top Layer w0.254: LCD1.3@30,41.08 30,41.071 30.698,40.373 54.51,40.373 55.137,41 v2(55.25,41) ; DD1.42 56.103,46.958 v2(56.103,46.677)
  Bottom Layer w0.254: v2(55.25,41) 56.103,41.853 v2(56.103,46.677)
COM7: DD1.43 LCD1.2 | length 36.4
  Top Layer w0.254: LCD1.2@30,38.54 31.898,38.54 33.277,39.919 55.419,39.919 v2(56.25,40.75) ; DD1.43 56.452,47.316 56.684,47.316 56.753,47.247 v2(56.753,47.177)
  Bottom Layer w0.254: v2(56.25,40.75) 57.077,41.577 57.077,46.829 56.75,47.156 56.753,47.159 v2(56.753,47.177)
COM8: DD1.44 LCD1.1 | length 39
  Top Layer w0.254: LCD1.1@30,36 33.465,39.465 55.965,39.465 v2(57,40.5) ; DD1.44 56.659,47.816 57.434,47.816 v2(57.5,47.75)
  Bottom Layer w0.254: v2(57,40.5) 57.65,41.15 57.65,47.6 v2(57.5,47.75)
Enable1: DD1.24 R10.2 | length 25.9
  Top Layer w0.254: R10.2 35.25,27.05 43.75,35.55 v1(43.75,38.75) ; v1(43.25,43) 43.25,45.207 44.543,46.5 44.646,46.5 DD1.24
  Bottom Layer w0.254: v1(43.25,43) 43.25,39.25 v1(43.75,38.75)
Enable2: DD1.23 R4.1 | length 20.1
  Top Layer w0.254: R4.1 36,33 41.5,38.5 v1(41.5,38.75) ; v1(41.75,42.5) 41.75,44.349 45.703,48.303 DD1.23
  Bottom Layer w0.254: v1(41.5,38.75) 41.75,39 v1(41.75,42.5)
GND: 1.2 2.1 C1.2 C2.2 C3.2 C4.2 C5.2 C6.2 C7.2 C9.2 C10.2 C11.2 C12.1 C13.1 C14.1 C15.1 C16.1 C17.1 C18.1 DA1.1 DD1.9 DD1.10 DD1.30 DD1.56 R2.2 R3.2 R7.2 R9.1 R12.2 R13.2 R14.2 VT2.5 VT3.5 XP1.4 | length 213.3
  Top Layer w0.254: C11.2 42.1,52.792 42.1,55.267 C9.2 ; C7.2 43.709,58.291 43.42,58.58 42.042,58.58 41.607,58.145 41.607,56.618 42.295,55.93 C9.2 ; C6.2 45.123,55.819 45.742,55.2 DD1.10 ; DD1.9 46.65,54.996 46.65,54.575 44.194,52.119 43.871,52.119 42.625,53.365 42.625,53.665 43.002,54.043 C10.2 C9.2 ; v1(46.75,42.75) 46.75,42.771 47.354,43.375 C16.1 47.354,44.964 DD1.30 ; DD1.56 55.377,56.523 C14.1
  Top Layer w0.3: R14.2 C18.1 C17.1 R13.2 C15.1 R12.2 26.25,65.5 v1(28.5,67.75) ; DA1.1@38.025,60.75 38.025,60.85 38.85,61.675 41.7,61.675 42.213,61.163 ; C1.2 R2.2 v1(42.5,62) 42.423,61.923 42.423,61.373 42.213,61.163 ; C7.2 C6.2 ; C3.2 42.625,60.75 42.213,61.163
  Top Layer w0.5: v1(27,25.75) VT3.5 28.05,25.655 28.845,25.655 29.25,25.25 29.25,24.348 29.848,23.75 R9.1 ; v1(27,31.75) VT2.5 28.752,31.75 29.25,31.252 29.25,30.5 30,29.75 R7.2 ; C4.2 38.025,60.75 DA1.1 38.05,60.675 38.5,60.225 38.5,60 C5.2 ; C12.1 55.076,62.25 55.675,62.25 56.662,61.263 ; C14.1 55.858,57.712 56.462,57.712 v1(56.5,57.75) 56.554,57.75 56.972,58.168 57.13,58.168 58.5,59.538 58.5,60.399 57.356,61.543 56.942,61.543 56.662,61.263 ; C13.1 57.649,60.276 56.662,61.263
  Top Layer w0.75: 1.2 25.75,70 ; R3.2 25.943,70 26.818,69.125 28.625,69.125 C2.2 ; v1(28.5,67.75) 29,68.25 C2.2 ; 37.25,59.25 37.25,55.5 39.439,53.311 40.061,53.311 40.5,53.75 v1(40.5,54) 40.725,54.225 40.725,55.849 41.438,56.562 ; 37.25,59.75 36.193,59.75 36.193,60.997 35.925,61.265 35.485,61.265 29.47,67.28 29.47,68.22 C2.2 ; 37.5,59.75 38.025,60.275 DA1.1@38.025,60.75
  Bottom Layer w0.3: v1(42.5,62) 48.92,68.42 XP1.4
  Bottom Layer w0.5: v1(40.5,54) 46,48.5 46,46.5 45.45,45.95 45.45,43.919 46.618,42.75 v1(46.75,42.75) 58,54 58,56.369 58.05,56.419 58.05,57.081 57.42,57.712 56.538,57.712 v1(56.5,57.75)
  Bottom Layer w0.75: v1(27,25.75) v1(27,31.75) 27,66.25 v1(28.5,67.75)
Net1_1: 1.1 R1.1 VT1.3 | length 24.4
  Top Layer w0.3: 39.25,64.5 R1.1
  Top Layer w0.75: 1.1 23.02,72.52 27.48,72.52 VT1.3 27.6,72.5 28.4,73.3 28.4,74.088 28.737,74.425 31.308,74.425 32.375,73.358 32.375,70.275 38.15,64.5 39.25,64.5
Net3_1: 3.1 C3.1 DD1.2 XP1.3 | length 21.8
  Top Layer w0.254: v1(47.25,60.75) C3.1 46.123,60.627 46.123,60.473 DD1.2
  Bottom Layer w0.254: 3.1 46.329,61.246 46.74,60.835 47.165,60.835 v1(47.25,60.75) 51.175,64.675 51.175,74.215 XP1.3
NetBQ1_1: BQ1.1 C12.2 DD1.61 | length 5.7
  Top Layer w0.254: DD1.61 54.83,59.512 54.83,60.422 BQ1.1
  Top Layer w0.5: C12.2 BQ1.1
NetBQ1_2: BQ1.2 C13.2 DD1.60 | length 5.5
  Top Layer w0.254: DD1.60 52.993,56.965 55.881,59.853 BQ1.2
  Top Layer w0.5: BQ1.2 C13.2
NetC1_1: C1.1 DD1.62 R1.2 R2.1 | length 16.5
  Top Layer w0.254: R1.2 41.25,64.45 41.7,64 R2.1 C1.1 49,64 53.25,59.75 53.25,58.639 DD1.62
NetC8_1: C8.1 VL1.1 VT2.4 VT2.6 | length 11.3
  Top Layer w0.5: 26.42,30.83 26.77,30.83 ; 26.42,32.67 26.647,32.67
  Top Layer w0.75: VL1.1 23.35,29.65 24.975,29.65 25.375,29.25 C8.1 27,30.6 26.77,30.83 27.925,30.83 VT2.6 ; 26.42,30.83 26,31.25 26,32.25 26.42,32.67 ; 26.647,32.67 27.925,32.67 VT2.4
NetC8_2: C8.2 VL1.2 VT3.4 VT3.6 | length 11
  Top Layer w0.5: 26.677,26.7 VT3.4
  Top Layer w0.75: VL1.2 23.182,27.642 24.939,27.642 25.547,28.25 C8.2 27,27.023 26.677,26.7 26.642,26.7 26.075,26.133 26.075,25.367 26.617,24.825 27.93,24.825 VT3.6
NetC11_1: C11.1 DD1.18 | length 3.7
  Top Layer w0.254: C11.1 41.588,50.712 42.803,49.497 43.366,49.497 43.939,50.071 DD1.18
NetDD1_1: DD1.1 XP1.2 | length 18.7
  Top Layer w0.254: DD1.1 48.924,58.382 48.355,58.951 48.355,59.161 v1(50,60.806)
  Bottom Layer w0.254: v1(50,60.806) 51.904,62.71 51.904,72.404 XP1.2
NetR3_1: R3.1 VT1.1 | length 2.1
  Top Layer w0.3: R3.1 28.25,70.05 29.125,70.925 29.125,71.3 29.375,71.55 VT1.1
NetR4_2: R4.2 R6.1 VT2.3 | length 3.8
  Top Layer w0.5: VT2.3 31.95,32.7 32.25,33 R6.1 R4.2
NetR5_2: R5.2 R7.1 VT2.1 | length 2.7
  Top Layer w0.5: VT2.1 30.595,30.75 R7.1 R5.2
NetR8_2: R8.2 R10.1 VT3.3 | length 3.8
  Top Layer w0.5: VT3.3 32.65,26.7 32.95,27 R8.2 R10.1
NetR9_2: R9.2 R11.1 VT3.1 | length 2.7
  Top Layer w0.5: VT3.1 30.595,24.75 R9.2 R11.1
OFF_MAN: C15.2 DD1.54 R12.1 SB1.1 | length 70.9
  Top Layer w0.254: v1(36.25,69.25) 36.254,69.246 58.611,69.246 63.391,64.466 63.391,61.933 57.432,55.975 56.373,55.975 56.242,55.844 56.112,55.844 DD1.54
  Top Layer w0.3: SB1.1 23.08,55 C15.2 R12.1
  Bottom Layer w0.254: SB1.1 22.3,55.78 22.3,62.543 29.007,69.25 v1(36.25,69.25)
PWM_Pulse1: DD1.25 R5.1 | length 22
  Top Layer w0.254: R5.1 34.5,30.75 v1(42.5,38.75) ; v1(44.5,45.5) 44.5,45.646 DD1.25
  Bottom Layer w0.254: v1(42.5,38.75) 42.5,43.5 v1(44.5,45.5)
PWM_Pulse2: DD1.27 R11.2 | length 27.7
  Top Layer w0.254: R11.2 44.75,35.25 v1(44.75,38.75) ; v1(44.5,41.75) 44.55,41.8 44.55,43.951 45.631,45.031 45.631,45.363 DD1.27
  Bottom Layer w0.254: v1(44.5,41.75) 44.5,39.5 44.75,39.25 v1(44.75,38.75)
RAIN_SETUP: C17.2 DD1.53 R13.1 SB1.2 | length 75.9
  Top Layer w0.254: SB1.2 23.02,52.52 25.23,52.52 25.25,52.54 R13.1 ; v1(36.25,70.25) 36.8,69.7 58.799,69.7 63.845,64.654 63.845,61.745 57.62,55.521 56.561,55.521 56.43,55.39 56.365,55.39 DD1.53
  Bottom Layer w0.254: SB1.2 21.873,53.667 21.873,54.169 21.823,54.219 21.823,62.708 29.365,70.25 v1(36.25,70.25)
SEG0: DD1.22 LCD1.9 | length 19.4
  Top Layer w0.254: LCD1.9@30,56.32 33.13,56.32 41.769,47.681 44.413,47.681 DD1.22
SEG1: DD1.21 LCD1.10 | length 19.8
  Top Layer w0.254: LCD1.10@30,58.86 31.24,58.86 41.965,48.135 44.16,48.135 DD1.21
SEG2: DD1.20 LCD1.11 | length 20.5
  Top Layer w0.254: LCD1.11@30,61.4 32,59.4 32,59.016 42.427,48.589 43.904,48.589 44.679,49.364 DD1.20
SEG3: DD1.19 LCD1.12 | length 22.1
  Top Layer w0.254: LCD1.12@30,63.94 30,63.74 32.625,61.115 32.625,59.033 42.615,49.043 43.619,49.043 44.293,49.717 DD1.19
SEG4: DD1.48 LCD1.13 | length 27
  Top Layer w0.254: DD1.48 57.661,49.642 61.684,49.642 75.982,63.94 LCD1.13@77.625,63.94
SEG5: DD1.47 LCD1.14 | length 26.5
  Top Layer w0.254: DD1.47 57.358,49.238 61.851,49.238 74.013,61.4 LCD1.14@77.625,61.4
SEG6: DD1.46 LCD1.15 | length 26
  Top Layer w0.254: DD1.46 57.055,48.834 62.019,48.834 72.045,58.86 LCD1.15@77.625,58.86
SEG7: DD1.45 LCD1.16 | length 26.9
  Top Layer w0.254: DD1.45 56.752,48.43 62.186,48.43 71.756,58 75.945,58 LCD1.16@77.625,56.32
SEG8: DD1.38 LCD1.17 | length 28.5
  Top Layer w0.254: DD1.38 54.834,45.398 56.181,45.398 57.662,46.879 70.924,46.879 77.625,53.58 LCD1.17@77.625,53.78
SEG9: DD1.37 LCD1.18 | length 28.5
  Top Layer w0.254: DD1.37 54.606,44.919 56.344,44.919 57.85,46.425 73.875,46.425 75.631,48.181 75.631,49.046 77.625,51.04 LCD1.18@77.625,51.24
SEG10: DD1.36 LCD1.19 | length 27.6
  Top Layer w0.254: DD1.36 54.353,44.465 56.532,44.465 58.033,45.966 74.459,45.966 75.607,47.114 76.239,47.114 77.625,48.5 LCD1.19@77.625,48.7
SEG11: DD1.35 LCD1.20 | length 27
  Top Layer w0.254: DD1.35 54.1,44.011 56.72,44.011 58.221,45.512 74.875,45.512 75.523,46.16 LCD1.20@77.625,46.16
SEG12: DD1.34 LCD1.21 | length 27.9
  Top Layer w0.254: DD1.34 53.847,43.557 56.908,43.557 58.409,45.058 76.442,45.058 77.625,43.875 LCD1.21@77.625,43.62
SEG13: DD1.33 LCD1.22 | length 29
  Top Layer w0.254: DD1.33 53.544,43.153 57.076,43.153 58.577,44.654 70.989,44.654 74.563,41.08 LCD1.22@77.625,41.08
SEG14: DD1.32 LCD1.23 | length 32.7
  Top Layer w0.254: DD1.32 51.296,42.749 57.243,42.749 58.744,44.25 70.821,44.25 76.531,38.54 LCD1.23@77.625,38.54
SEG15: DD1.31 LCD1.24 | length 35.9
  Top Layer w0.254: DD1.31 48.571,45.472 47.844,44.745 47.844,44.406 49.905,42.345 51.058,42.345 51.108,42.295 57.57,42.295 58.99,43.715 70.11,43.715 77.625,36.2 LCD1.24@77.625,36
VDDA: C9.1 C10.1 DD1.12 DD1.13 L1.2 | length 5.5
  Top Layer w0.254: DD1.13 43.899,54.919 43.899,55.098 43.709,55.288 C10.1 43.883,55.462 44.073,55.272 44.253,55.272 DD1.12
  Top Layer w0.3: L1.2 42.33,56.877 43.002,56.205 C9.1 C10.1
pads on no net: DD1.3 DD1.4 DD1.8 DD1.14 DD1.15 DD1.16 DD1.17 DD1.28 DD1.39 DD1.40 DD1.49 DD1.57 DD1.58 DD1.59 DD1.63 DD1.64

## Polygon pours and split planes (outlines as drawn)
GND on Top Layer "Bottom Layer-GND" (solid, pour order 0): 38.75,58.75 38.75,61.75 37.65,61.75 37.15,61.25 36,61.25 36,59.5 36.75,58.75

## Silkscreen, mask and mechanical layers (free items; w line width, h text height)
Top Overlay:
  text "Rev. 1.1" at 84,55 h0.8 r90
  text "Made in India, 2021" at 82.75,54.5 h0.8 r90
Bottom Overlay:
  lines w0.3: 24.65,70 25.95,70 ; 24.65,72.55 25.95,72.55 ; 24.85,27.45 26.15,27.45 ; 24.85,30 26.15,30 ; 25.3,71.9 25.3,73.2 ; 25.5,29.35 25.5,30.65
Mechanical 4 (Mech4):
  lines w0.5: 83,34 85,36 85,48 82,48 cw(c82,50) 80,50 cw(c82,50) 82,52 85,52 85,64 83,66 81,68 77,68 cw(c77,70) 75,70 75,82 ccw(c72,82) 72,85 23,85 ccw(c23,82) 20,82 20,18 ccw(c23,18) 23,15 72,15 ccw(c72,18) 75,18 75,30 cw(c77,30) 77,32 81,32 83,34 ; 83,34 83,34

## Text inside footprints (layer, text, board x,y; h text height)
1: Top Overlay "VBAT" at 21,74.5 h1
XP1: Bottom Overlay "1" at 59.08,73.865 h0.64